# Altium PCB Hbridge.PcbDoc
Units mm, origin at the board's own origin, x right, y up, seen from the top; angles counter-clockwise.
Board outline 102.96 x 53.4 mm, 2 copper layers (Top Layer, Bottom Layer); 37 components, 0 nets, 90 pads, 2 vias.
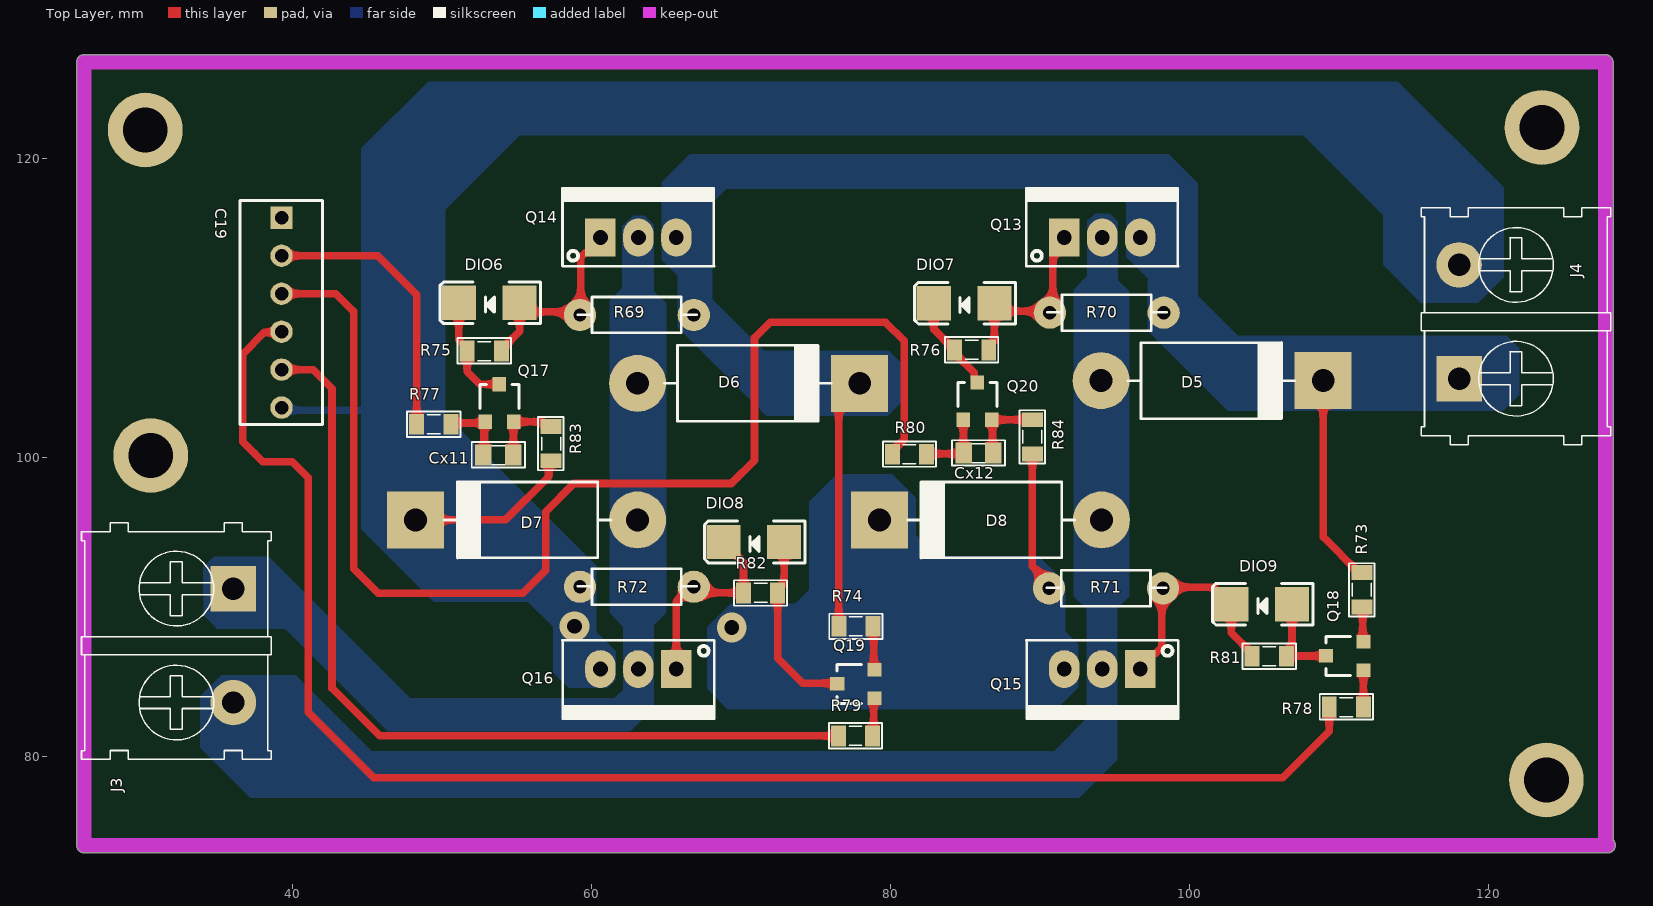
[diagram p0: Top Layer view]
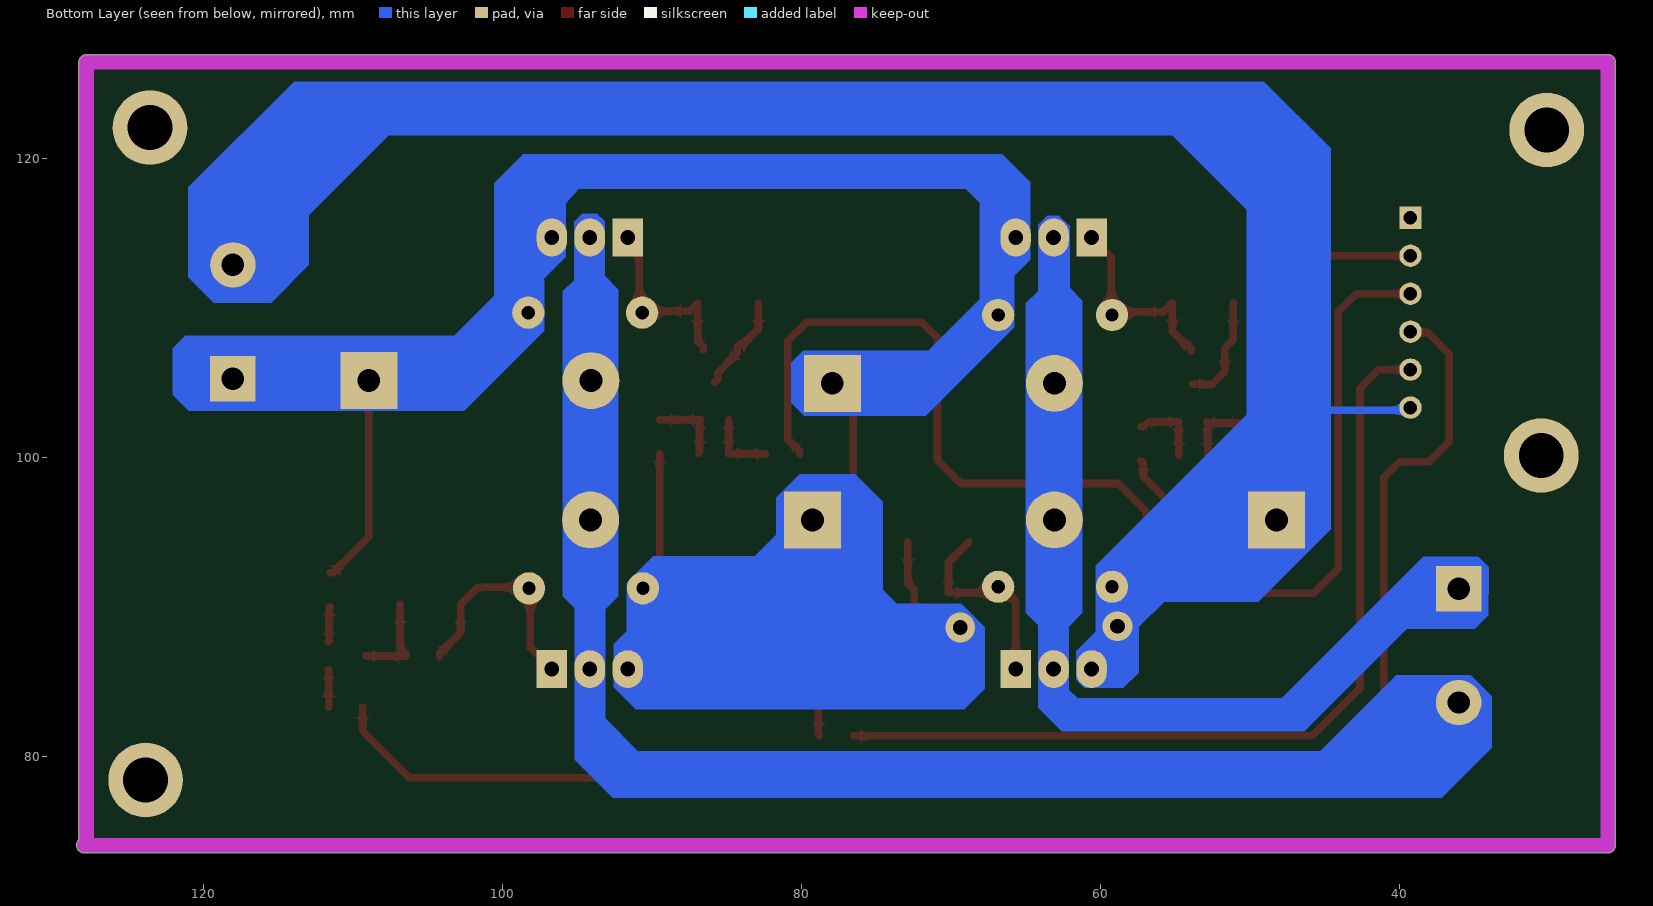
[diagram p1: Bottom Layer view, seen from below]

## Layer stack, top to bottom
Top Solder: solder mask 0.0102, Solder Resist, Dk 3.5
Top Layer: signal copper 0.0356
Dielectric 1: dielectric 0.32, FR-4, Dk 4.8
Bottom Layer: signal copper 0.0356
Bottom Solder: solder mask 0.0102, Solder Resist, Dk 3.5

## Board outline
26.035,73.541 cw(c26.035,74.041) 25.535,74.041 25.535,126.441 cw(c26.035,126.441) 26.035,126.942 127.838,126.942 cw(c127.838,126.441) 128.339,126.441 128.339,74.401 cw(c127.991,74.041) 128.491,74.041 cw(c127.991,74.041) 127.991,73.541

## Design rules (kind name [scope] priority, off if disabled: settings)
Clearance [All] p1: gap=0.254
PolygonConnect [All] p1: connectstyle=Relief reliefconductorwidth=0.254 reliefentries=4 polygonreliefangle="90 Angle" airgapwidth=0.254
RoutingVias [All] p1: holewidth=0.711 width=1.27 viastyle="Through Hole" minholewidth=0.711 minwidth=1.27 maxholewidth=0.711 maxwidth=1.27
SolderMaskExpansion [All] p1: expansion=0.102
Width [All] p1: maxlimit=0.762 minlimit=0.254 preferedwidth=0.508
30 further rules are at their usual default settings.

## Components (designator, comment, footprint, x,y, rotation, side; value= is the part's Value field where it differs from the comment)
C19 "Header6" HDR6 39.243,116.027 r270 top
Cx11 "104" CN-SMD-0805 53.746,100.152 r180 top
Cx12 "104" CN-SMD-0805 85.877,100.279 r180 top
D5 "5A" DIO-5A 108.306,105.131 r180 top
D6 "5A" DIO-5A 77.292,104.953 r180 top
D7 "5A" DIO-5A 48.844,95.809 r0 top
D8 "5A" DIO-5A 79.883,95.809 r0 top
DIO6 "M7" DIO-SMD-106 53.137,110.338 r0 top
DIO7 "M7" DIO-SMD-106 84.912,110.312 r0 top
DIO8 "M7" DIO-SMD-106 70.841,94.336 r0 top
DIO9 "M7" DIO-SMD-106 104.826,90.17 r0 top
J3 "KF2" KF2-7.62 32.207,87.401 r270 top
J4 "KF2" KF2-7.62 121.844,109.068 r90 top
Q13 "IRF4905" TO220-123 91.618,114.706 r0 top
Q14 "IR4905" TO220-123 60.579,114.706 r0 top
Q15 "IRF3205" TO220-123 96.698,85.827 r180 top
Q16 "IRF3205" TO220-123 65.659,85.827 r180 top
Q17 "2SC1815" SOT23-321 53.823,103.632 r0 top
Q18 "2SA1015" SOT23-321 110.388,86.716 r90 top
Q19 "2SA1015" SOT23-321 77.673,84.836 r90 top
Q20 "2SC1815" SOT23-321 85.801,103.759 r0 top
R69 "1k" RES-1/4W-SMALL 63.271,109.525 r180 top
R70 "1k" RES-1/4W-SMALL 94.717,109.677 r180 top
R71 "10k" RES-1/4W-SMALL 94.666,91.237 r180 top
R72 "10k" RES-1/4W-SMALL 63.271,91.338 r180 top
R73 "1k" RES-SMD-0805 111.531,91.135 r270 top
R74 "1k" RES-SMD-0805 77.673,88.697 r0 top
R75 "1k" RES-SMD-0805 52.807,107.112 r180 top
R76 "1k" RES-SMD-0805 85.42,107.188 r180 top
R77 "1k" RES-SMD-0805 49.428,102.21 r180 top
R78 "1k" RES-SMD-0805 110.49,83.287 r180 top
R79 "1k" RES-SMD-0805 77.648,81.356 r180 top
R80 "1k" RES-SMD-0805 81.255,100.203 r180 top
R81 "1k" RES-SMD-0805 105.334,86.69 r0 top
R82 "1k" RES-SMD-0805 71.298,90.932 r0 top
R83 "1k" RES-SMD-0805 57.277,100.914 r270 top
R84 "1k" RES-SMD-0805 89.484,101.371 r270 top

## Footprints (in the part's own frame and the unit in brackets; to place one, negate y for a bottom-side part, rotate by r counter-clockwise, add the part's x,y. Pads: shape width x height; smd on the part's side, far side on the other; paste and mask are expansions set on the pad)
CN-SMD-0805 [mm]
  rect 1.1x1.397 smd paste+0 mask-1.397: 1(-1,0) 2(1,0)
  silkscreen extent -1.78,-0.86 1.78,0.84, body extent -1,-0.62 1,0.63, height 0.8
DIO-5A [mil] "Diode 5A, W 200mil, L 550mil"
  round 150 hole 60 paste+0 mask-150: 1(560,0)
  rect 150x150 hole 60 paste+0 mask-150: 2(-25,0)
  silkscreen extent 50,-100 490,100, body extent -52,-106 590,103, height 211
DIO-SMD-106 [mil]
  rect 90x90.55 smd paste+0 mask-90.55: 1(80,0) 2(-80,0)
  silkscreen extent -130,-55 135,55, body extent -99,-50 106,52, height 95
HDR6 [mm] "Connector; Header; 6 Position"
  rect 1.5x1.5 hole 0.9 paste+0 mask-1.5: 1(0,0)
  round 1.5 hole 0.9 paste+0 mask-1.5: 2(2.54,0) 3(5.08,0) 4(7.62,0) 5(10.16,0) 6(12.7,0)
  silkscreen extent -1.14,-2.79 13.84,2.74, body extent -1.27,-2.92 13.97,2.88, height 11.72
KF2-7.62 [mil]
  rect 120x120 hole 59.06 paste+0 mask-120: 1(-150,150)
  round 120 hole 59.06 paste+0 mask-120: 2(150,150)
  silkscreen extent -324,-250 300,250, body extent -300,-241 300,231, height 337
RES-1/4W-SMALL [mil]
  round 85 hole 35 paste+0 mask-85: 1(-140,0) 2(160,0)
  silkscreen extent -148,-47 166,47, body extent -152,-47 172,47, height 97
RES-SMD-0805 [mil]
  rect 39.37x55 smd paste+0 mask-55: 1(-45,0) 2(45,0)
  silkscreen extent -70,-34 70,33, body extent -39,-25 39,25, height 31
SOT23-321 [mm]
  rect 0.9x0.95 smd mask+0: 1(0.95,-1.25)
  rect 0.9x0.95 smd paste+0 mask-0.95: 2(0,1.25) 3(-0.95,-1.25)
  silkscreen extent -1.3,-0.38 1.3,1.25, body extent -1.52,-1.23 1.48,1.27, height 1.06
TO220-123 [mil] "TO-220 - 1-2-3"
  rect 80x100 hole 39 paste+0 mask-100: 1(0,0)
  oval 80x100 hole 39 paste+0 mask-100: 2(100,0) 3(200,0)
  silkscreen extent -100,-76 300,130, body extent -95,-80 295,97, height 323

## Part data
C19: "Header IDC, 6 x 1 Pin Vertical 2.54mm Pitch (Non-Boxed, Male)"
Cx11 Cx12: library part CN
D5 D6 D7 D8: library part Diode, "Default Diode"
DIO6 DIO7 DIO8 DIO9: library part "Diode SMD", "Default Diode"
Q13 Q14: library part IRF9540, "HEXFET P-Channel Power MOSFET"
Q15 Q16: library part IRFZ44
Q17 Q20: "NPN 600mW, ECB"
Q18 Q19: "PNP 600mW, ECB"
R69 R70 R71 R72: library part Res, "Res"
R73 R74 R75 R76 R77 R78 R79 R80 R81 R82 R83 R84: library part Res-SMD, "Resistor"

## Free pads (board coordinates)
  round 5 hole 3 paste+0 mask+0: 2(30.124,121.895) 2(30.489,100.116) 2(123.58,122.062) 2(123.876,78.41)

## Via types
v1: diameter 2, hole 1, Top Layer to Bottom Layer, 2 vias

## Nets (pads, with @x,y where several pads share a name; then routed paths per layer and width w, separated by ;. In a path a pad name is that pad's centre, name@x,y a point inside that pad or via, vN(x,y) a via of type N, cw(c..) or ccw(c..) an arc to the next point about the centre after c; other vN are vias at no path point)
pads on no net: C19.1 C19.2 C19.3 C19.4 C19.5 C19.6 Cx11.1 Cx11.2 Cx12.1 Cx12.2 D5.1 D5.2 D6.1 D6.2 D7.1 D7.2 D8.1 D8.2 DIO6.1 DIO6.2 DIO7.1 DIO7.2 DIO8.1 DIO8.2 DIO9.1 DIO9.2 J3.1 J3.2 J4.1 J4.2 Q13.1 Q13.2 Q13.3 Q14.1 Q14.2 Q14.3 Q15.1 Q15.2 Q15.3 Q16.1 Q16.2 Q16.3 Q17.1 Q17.2 Q17.3 Q18.1 Q18.2 Q18.3 Q19.1 Q19.2 Q19.3 Q20.1 Q20.2 Q20.3 R69.1 R69.2 R70.1 R70.2 R71.1 R71.2 R72.1 R72.2 R73.1 R73.2 R74.1 R74.2 R75.1 R75.2 R76.1 R76.2 R77.1 R77.2 R78.1 R78.2 R79.1 R79.2 R80.1 R80.2 R81.1 R81.2 R82.1 R82.2 R83.1 R83.2 R84.1 R84.2
copper on no net: | length 440
  Top Layer w0.508: 39.243,105.867 41.351,105.867 42.621,104.597 42.621,84.557 45.822,81.356 76.505,81.356 ; 39.243,108.407 39.192,108.356 38.1,108.356 36.652,106.909 36.652,101.041 37.44,100.254 37.44,100.228 37.973,99.695 39.954,99.695 41.021,98.628 41.021,82.956 45.415,78.562 106.248,78.562 109.347,81.661 109.347,83.287 ; 39.243,110.947 42.875,110.947 44.069,109.753 44.069,92.558 45.72,90.907 55.372,90.907 56.921,92.456 56.921,96.368 58.801,98.247 69.342,98.247 70.891,99.797 70.891,108.001 71.933,109.042 79.654,109.042 80.899,107.798 80.899,101.189 80.112,100.401 80.112,100.203 ; 39.243,113.487 45.669,113.487 48.285,110.871 48.285,102.21 ; 48.209,95.809 54.229,95.809 57.125,98.704 57.125,99.619 57.277,99.771 ; 50.571,102.21 50.658,102.296 52.786,102.296 52.809,102.319 ; 51.105,110.338 51.105,107.869 51.664,107.31 51.664,107.112 51.664,105.715 52.496,104.882 53.823,104.882 ; 52.746,100.152 52.809,100.215 52.809,102.319 ; 52.873,102.382 52.809,102.319 ; 53.95,107.112 53.95,107.31 54.196,107.556 54.3,107.556 55.169,108.426 55.169,110.338 55.778,109.728 59.004,109.728 59.207,109.525 ; 54.746,100.152 54.759,100.165 54.759,102.369 54.773,102.382 56.754,102.382 57.079,102.057 57.277,102.057 ; 59.258,110.312 59.258,113.386 59.563,113.69 59.817,113.69 60.579,114.452 60.579,114.706 ; 65.659,85.827 65.659,90.348 66.65,91.338 67.274,91.338 67.681,90.932 70.155,90.932 70.155,92.982 68.809,94.329 68.809,94.336 ; 72.873,94.336 72.873,91.562 72.441,91.13 72.441,90.932 72.441,86.563 74.117,84.887 76.372,84.887 76.423,84.836 ; 76.53,88.697 76.53,103.556 77.927,104.953 ; 78.791,81.356 78.857,81.422 78.857,83.82 78.923,83.886 ; 78.816,88.697 78.87,88.643 78.87,85.84 78.923,85.786 ; 82.398,100.203 82.436,100.241 84.839,100.241 84.877,100.279 84.864,100.292 84.864,102.496 84.851,102.509 ; 82.88,110.312 82.88,108.585 83.833,107.632 84.031,107.632 84.277,107.386 84.277,107.188 84.277,106.99 85.605,105.662 85.605,105.205 85.801,105.009 ; 86.563,107.188 86.563,107.386 86.944,107.767 86.944,110.312 87.478,109.779 90.551,109.779 90.653,109.677 ; 86.877,100.279 86.814,100.342 86.814,102.446 86.751,102.509 86.754,102.512 89.481,102.512 89.484,102.514 ; 89.484,100.228 89.484,92.723 90.602,91.606 90.602,91.237 ; 90.703,110.312 90.856,110.465 90.856,113.944 91.618,114.706 ; 96.698,85.827 96.698,86.081 97.46,86.843 97.714,86.843 98.146,87.274 98.146,91.161 98.298,91.313 101.658,91.313 102.794,90.177 102.794,90.17 102.794,88.258 103.917,87.135 103.945,87.135 104.191,86.889 104.191,86.69 ; 106.858,90.17 106.858,87.27 106.477,86.889 106.477,86.69 106.489,86.703 109.126,86.703 109.138,86.716 ; 108.941,105.131 108.941,94.671 111.333,92.278 111.531,92.278 ; 111.531,89.992 111.585,89.939 111.585,87.719 111.638,87.666 ; 111.633,83.287 111.636,83.289 111.636,85.763 111.638,85.766
  Bottom Layer w0.508: 39.243,103.327 39.421,103.149 46.025,103.149 ; v1@68.834,88.341 69.088,88.341 v1(69.367,88.621)
  other v1: 58.852,88.697

## Keep-outs
Keep-Out Layer:
  lines w1: 127.838,74.041 127.838,126.441 26.035,126.441 26.035,74.041 127.991,74.041

## Other copper
Bottom Layer:
  region: 92.558,84.607 92.558,87.503 91.694,88.367 91.694,91.592 89.916,93.37 83.134,93.37 81.686,94.818 81.686,97.282 80.112,98.857 76.378,98.857 74.549,97.028 74.549,91.135 73.609,90.195 69.291,90.195 67.716,88.621 67.716,84.506 69.088,83.134 91.084,83.134
  region: 118.389,110.338 119.304,110.338 121.031,112.065 121.031,118.059 113.944,125.146 49.047,125.146 44.577,120.675 44.577,95.199 49.428,90.348 55.728,90.348 57.429,88.646 57.429,85.598 58.445,84.582 61.087,84.582 61.62,85.115 61.62,87.02 60.3,88.341 60.3,91.389 60.3,92.735 50.19,102.845 50.19,116.561 55.194,121.564 107.594,121.564 112.954,116.205 112.954,112.878 115.519,110.312
  region: 93.116,82.525 90.932,80.34 45.263,80.34 40.183,85.42 35.204,85.42 33.807,84.023 33.807,80.569 37.16,77.216 92.608,77.216 95.148,79.756 95.148,87.046 94.615,87.579 94.564,87.528 93.383,87.528 93.116,87.262
  region: 34.011,92.227 34.011,92.634 34.722,93.345 38.379,93.345 39.497,92.227 47.854,83.871 61.519,83.871 62.103,84.455 62.103,86.487 62.738,87.122 63.792,87.122 64.135,86.779 64.135,83.236 62.56,81.661 46.355,81.661 39.497,88.519 34.95,88.519 34.036,89.433
  region: 37.541,87.02
  region: 64.694,115.037 64.694,118.415 66.548,120.269 98.603,120.269 100.533,118.339 100.533,111.938 99.466,111.887 97.231,111.887 97.231,111.938 95.758,113.411 95.758,116.994 94.894,117.958 68.986,117.958 68.072,117.043 68.072,115.037
  region: 64.694,115.468
  region: 33.655,91.338
  region: 96.418,116.154 95.758,115.494 95.758,113.411 97.257,111.912 97.206,111.862 97.206,108.483 102.565,103.124 110.896,103.124 121.006,103.124 122.072,104.191 122.072,107.29 121.234,108.128 103.226,108.128 100.533,110.82 100.533,115.011 99.441,116.103
  region: 65.227,116.002 64.694,115.468 64.694,113.208 65.761,112.141 65.761,108.712 71.679,102.794 79.807,102.794 80.67,103.657 80.67,106.324 79.858,107.137 71.501,107.137 68.072,110.566 68.072,115.037 67.107,116.002
  region: 93.675,116.307 94.666,116.307 95.199,115.773 95.199,111.862 95.961,111.1 95.961,90.703 95.174,89.916 95.174,84.684 94.691,84.201 93.599,84.201 93.116,84.684 93.116,89.84 92.253,90.703 92.253,111.227 93.167,112.141 93.167,115.799
  region: 93.142,115.214
  region: 62.103,115.519 62.763,116.18 63.551,116.18 64.16,115.57 64.16,111.125 64.973,110.312 64.973,89.586 64.135,88.748 64.135,84.811 63.729,84.404 62.408,84.404 62.103,84.709 62.103,88.671 61.189,89.586 61.189,110.49 62.052,111.354 62.052,115.519

## Silkscreen, mask and mechanical layers (free items; w line width, h text height)
Bottom Solder:
  lines w0.762: 69.215,84.836 89.916,84.836 ; 69.342,86.614 89.535,86.614 ; 71.755,88.519 90.297,88.519 ; 75.311,90.297 89.281,90.297 ; 75.946,93.345 75.946,97.155 ; 76.2,92.075 88.773,92.075
  lines w1: 118.034,115.265 118.034,112.878 118.034,116.002 118.11,116.078
  lines w1.27: 36.017,91.211 38.329,91.211 46.609,82.931 62.357,82.931 63.119,83.693 ; 58.852,88.697 58.852,86.436 59.461,85.827 ; 63.119,85.827 63.119,114.706 ; 77.724,105.156 71.399,105.156 66.929,109.626 66.929,113.284 65.659,114.554 65.659,116.84 67.945,119.126 96.647,119.126 98.273,117.5 98.273,109.677 ; 94.107,80.899 94.107,85.776 94.107,96.012 94.082,96.037 94.082,105.512 93.98,105.613 93.98,114.808 94.107,114.935
  lines w1.778: 36.017,83.591 36.017,81.077 38.354,78.74 91.948,78.74 94.107,80.899
  lines w2.032: 57.912,91.567 53.67,95.809 48.209,95.809 47.625,96.393 47.625,118.618 52.324,123.317 110.363,123.317 118.034,115.646 118.034,112.878 ; 99.568,108.839 102.616,105.791 103.149,105.258 118.034,105.258